# Allegro board SPARTAN6_TEST_V10A.brd
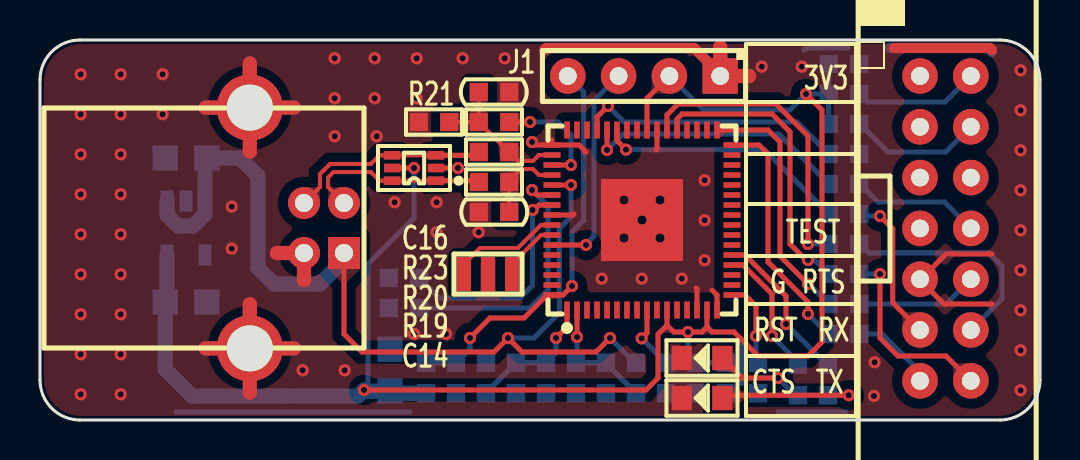
[diagram p0: board, top side]
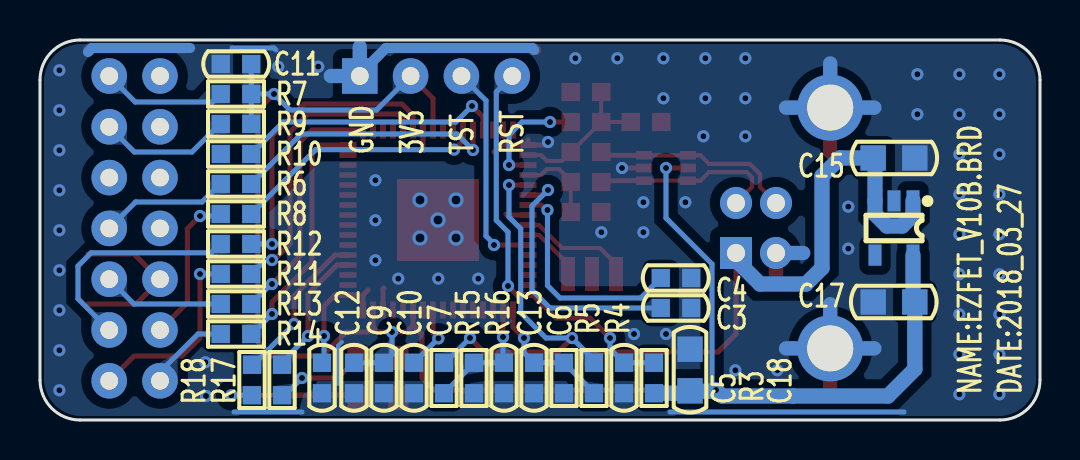
[diagram p1: board, bottom side, seen from below]

Outline 50 x 19 mm; copper layers: TOP, BOTTOM. Coordinates in mm from the lower left corner of the outline.
Outline path: 0,17 0,2 arc(0.59,0.59) 2,0 48,0 arc(49.41,0.59) 50,2 50,17 arc(49.41,18.41) 48,19 2,19 arc(0.59,18.41) 0,17

## Design rules (mm)
constraint set DEFAULT: min track width 0.203, pair gap 0.203
net group DIFFPAIR0: nets EZFET_DM EZFET_DP
net group DP2: nets EZFET_PU.0/DP EZFET_PU.1/DM

## Placement (name value [footprint] x y rotation side)
C3  220nF_50V  [CC0603]  18.2 5.6 0 bottom
C4  220nF_50V  [CC0603]  18.2 7.1 0 bottom
C5  1nF_50V  [CC0603]  20.8 2.1 90 bottom
C6  33pF_50V  [CC0603]  25.3 2.1 90 bottom
C7  0.1uF_50V  [CC0603]  31.3 2.1 90 bottom
C9  0.1uF_50V  [CC0603]  34.3 2.1 90 bottom
C10  0.1uF_50V  [CC0603]  32.8 2.1 90 bottom
C11  0.1uF_50V  [CC0603]  40.2 17.8 180 bottom
C12  470nF_50V  [CC0603]  35.9 2.1 90 bottom
C13  33pF_50V  [CC0603]  26.8 2.1 90 bottom
C14  10pF_50V  [CC0603]  22.7 10.4 0 top
C15  10uF_25V  [CC0805]  7.3 13.1 180 bottom
C16  10pF_50V  [CC0603]  22.7 16.4 180 top
C17  10uF_25V  [CC0805]  7.3 5.9 0 bottom
C18  10uF_25V  [CC0805]  17.5 2.5 90 bottom
D1  LED_RED  [LED0805]  33.1 3.1 180 top
D2  LED_GREEN  [LED0805]  33.1 1.1 180 top
J1  HEADER4X1_2R54/NI  [HEADER4X1_2R54]  30.2 17.2 180 top
JP2  -  [JTAG]  44 17.2 270 top
NOREF  -  []  0 0 90 top
NOREF#2  -  []  0 0 0 top
R3  47K  [RC0603]  19.3 2.1 90 bottom
R4  240K  [RC0603]  22.3 2.1 270 bottom
R5  150K  [RC0603]  23.8 2.1 270 bottom
R6  10R  [RC0603]  40.2 11.8 0 bottom
R7  0R  [RC0603]  40.2 16.3 0 bottom
R8  10R  [RC0603]  40.2 10.3 0 bottom
R9  0R/NI  [RC0603]  40.2 14.8 0 bottom
R10  10R  [RC0603]  40.2 13.3 0 bottom
R11  10R  [RC0603]  40.2 7.3 0 bottom
R12  10R  [RC0603]  40.2 8.8 0 bottom
R13  10R  [RC0603]  40.2 5.8 0 bottom
R14  10R  [RC0603]  40.2 4.3 0 bottom
R15  220K  [RC0603]  29.8 2.1 270 bottom
R16  220K  [RC0603]  28.3 2.1 270 bottom
R17  510R  [RC0603]  37.9 2 90 bottom
R18  510R  [RC0603]  39.4 2 90 bottom
R19  27R  [RC0603]  22.7 11.9 0 top
R20  27R  [RC0603]  22.7 13.4 0 top
R21  1M  [RC0603]  19.7 14.9 0 top
R23  1.4K  [RC0603]  22.7 14.9 0 top
U1  MSP430F5528IRGC  [VQFN-64]  30.1 10 0 top
U2  SPX3819M5-L-3-3/TR  [SOT23-5]  7.3 9.6 0 bottom
U3  NUP4202W1T2G  [SC-88]  18.7 12.6 180 top
USB1  -  [USB-B]  15.2 9.6 270 top
X1  CSTCR4M00G53  [X-3P-3R2X1R3-SMD]  21.2 7.3 0 top

## Library data of the parts
C3-C7 C9-C14 C16 = CAP NP
C15 C17 C18 = CAP NP_2
D1 D2 = LED_4
J1 = CONN RCPT 4
JP2 = JTAG
R3-R21 R23 = R_Generic
U1 = MSP430F5528IRGC
U2 = SPX3819M5-L-1-2
U3 = nup2202w1_D_2
USB1 = USB-B
X1 = XTAL_5032_0

## Footprints (pads in the part's own frame, mm; a bottom-side part is the same pattern mirrored in y, then rotated)
CC0603
  rect 0.914x0.914 smd: 1(-0.762,0) 2(0.762,0)
CC0805
  rect 1.27x1.27 smd: 1(-1.041,0) 2(1.041,0)
HEADER4X1_2R54
  rect 1.778x1.778 hole 0.889: 1(-3.81,0)
  round 1.778 hole 0.889: 2(-1.27,0) 3(1.27,0) 4(3.81,0)
JTAG
  round 1.778 hole 0.889: 1(0,0) 2(0,2.54) 3(2.54,0) 4(2.54,2.54) 5(5.08,0) 6(5.08,2.54) 7(7.62,0) 8(7.62,2.54) 9(10.16,0) 10(10.16,2.54) 11(12.7,0) 12(12.7,2.54) 13(15.24,0) 14(15.24,2.54)
LED0805
  rect 1.016x1.219 smd: 1(-1.016,0) 2(1.016,0)
RC0603
  rect 0.914x0.914 smd: 1(-0.762,0) 2(0.762,0)
SC-88
  rect 0.813x0.432 smd: 1(-1.092,0.635) 2(-1.092,0) 3(-1.092,-0.635) 4(1.092,-0.635) 5(1.092,0) 6(1.092,0.635)
SOT23-5
  rect 0.65x1.06 smd: 1(-0.95,-1.354) 2(0,-1.354) 3(0.95,-1.354) 4(0.95,1.354) 5(-0.95,1.354)
USB-B
  rect 1.6x1.6 hole 0.9: 1(1.25,0)
  round 1.6 hole 0.9: 2(-1.25,0) 3(-1.25,-2) 4(1.25,-2)
  round 3.3 hole 2.3: 5(6.02,-4.71) 6(-6.02,-4.71)
VQFN-64
  rect 0.28x0.85 smd: 1(-3.75,-4.5) 2(-3.25,-4.5) 3(-2.75,-4.5) 4(-2.25,-4.5) 5(-1.75,-4.5) 6(-1.25,-4.5) 7(-0.75,-4.5) 8(-0.25,-4.5) 9(0.25,-4.5) 10(0.75,-4.5) 11(1.25,-4.5) 12(1.75,-4.5) 13(2.25,-4.5) 14(2.75,-4.5) 15(3.25,-4.5) 16(3.75,-4.5) 33(3.75,4.5) 34(3.25,4.5) 35(2.75,4.5) 36(2.25,4.5) 37(1.75,4.5) 38(1.25,4.5) 39(0.75,4.5) 40(0.25,4.5) 41(-0.25,4.5) 42(-0.75,4.5) 43(-1.25,4.5) 44(-1.75,4.5) 45(-2.25,4.5) 46(-2.75,4.5) 47(-3.25,4.5) 48(-3.75,4.5)
  rect 0.85x0.28 smd: 17(4.5,-3.75) 18(4.5,-3.25) 19(4.5,-2.75) 20(4.5,-2.25) 21(4.5,-1.75) 22(4.5,-1.25) 23(4.5,-0.75) 24(4.5,-0.25) 25(4.5,0.25) 26(4.5,0.75) 27(4.5,1.25) 28(4.5,1.75) 29(4.5,2.25) 30(4.5,2.75) 31(4.5,3.25) 32(4.5,3.75) 49(-4.5,3.75) 50(-4.5,3.25) 51(-4.5,2.75) 52(-4.5,2.25) 53(-4.5,1.75) 54(-4.5,1.25) 55(-4.5,0.75) 56(-4.5,0.25) 57(-4.5,-0.25) 58(-4.5,-0.75) 59(-4.5,-1.25) 60(-4.5,-1.75) 61(-4.5,-2.25) 62(-4.5,-2.75) 63(-4.5,-3.25) 64(-4.5,-3.75)
  rect 4.1x4.1 smd: 65(0,0)
X-3P-3R2X1R3-SMD
  rect 0.7x1.7 smd: 1(0,0) 2(1.2,0) 3(2.4,0)

## Nets
GND: C3.1 C4.1 C5.1 C6.1 C7.1 C9.1 C10.1 C11.1 C12.1 C13.1 C14.1 C15.2 C16.1 C17.2 C18.2 D1.2(CATHODE) D2.2(CATHODE) J1.1 JP2.9 R5.2 R16.2 R21.1 U1.14 U1.16 U1.39 U1.49 U1.56 U1.65 U2.2 U3.2 USB1.4 USB1.5 USB1.6 X1.2
VCC_TARGET: JP2.4 R9.2
VCC_TOOL: JP2.2 R7.2
EZFET_AVBUS: C6.2 R4.2 R5.1 U1.1
EZFET_AVCC2ADC: C13.2 R15.2 R16.1 U1.2
EZFET_DM: R19.1 U3.1 U3.6 USB1.2
EZFET_DP: R20.1 U3.3 U3.4 USB1.3
EZFET_LED0: R17.2 U1.20
EZFET_LED1: R18.2 U1.21
EZFET_PU.0/DP: C16.2 R20.2 R21.2 R23.1 U1.50
EZFET_PU.1/DM: C14.2 R19.2 U1.52
EZFET_PUR: R23.2 U1.51
EZFET_RST: C5.2 J1.4 R3.2 U1.64
EZFET_TCK: U1.63
EZFET_TDI: U1.61
EZFET_TDO: U1.60
EZFET_TEST: J1.3 U1.59
EZFET_TMS: U1.62
EZFET_V18: C4.2 U1.55
EZFET_VBUS: C15.1 R4.1 R15.1 U1.53 U2.1 U2.3 USB1.1(VBUS)
EZFET_VCC: C9.2 C10.2 C11.2 C17.1 C18.1 J1.2 R3.1 R7.1 R9.1 U1.11 U1.15 U1.40 U2.5(VOUT) U3.5
EZFET_VCORE: C12.2 U1.17
EZFET_VREF: C7.2 U1.9
EZFET_VUSB: C3.2 U1.54(VUSB)
T_NC_TMSC: R10.2
T_RST_RST: JP2.11 R8.2
T_TEST_TCKC: JP2.8 R6.2
T_UART_CTS: JP2.13 R14.2
T_UART_RTS: JP2.10 R13.2
T_UART_RXD: JP2.12 R12.2
T_UART_TXD: JP2.14 R11.2
N16723149: U1.58 X1.3
N16723151: U1.57 X1.1
N16723191: D1.1 R17.1
N16723193: D2.1 R18.1
N16723211: R14.1 U1.32
N16723239: R11.1 U1.37
N16723243: R12.1 U1.38
N16723247: R13.1 U1.33
N16729620: R6.1 U1.44
N16729632: R8.1 U1.43
N16729644: R10.1 U1.45

Pads without a net: JP2 1 3 5 6 7; U1 3 4 5 6 7 8 10 12 13 18 19 22 23 24 25 26 27 28 29 30 31 34 35 36 41 42 46 47 48; U2 4

## Via types
v1: diameter 0.61, hole 0.305, TOP to BOTTOM, 92 vias
v2: diameter 0.762, hole 0.457, TOP to BOTTOM, 5 vias

## Routing (per net, layer and track width the routed paths; a pad name or vN(x,y) marks a point on that pad's centre or on a via; arc(x,y) is an arc through that point)
GND: length 105.8
  TOP w0.254: v1(24.6,13.9) 24.75,13.75 U1.49 ; U1.49 26.95,13.75 27.3,13.4 ; U1.49 25.6,14 ; 45.5,8.3 47.6,8.3 ; 30.8,13.5 30.85,13.55 U1.39 ; 26.7,10.3 26.65,10.25 U1.56 ; 47.6,5.8 45.2,5.8 44,7 JP2.9 44.04,7.04 45.3,8.3 ; 32.8,6.6 32.85,6.55 U1.14 ; 33.6,6.5 33.85,6.25 U1.16 ; U3.2 v1(20.9,12.6)
  TOP w0.508: 25.2,18.5 25.3,18.6 32.7,18.6 34.01,17.29 ; 42.7,18.6 47.5,18.6 47.6,18.5
  TOP w0.711: 35.46,17.2 J1.1 34.01,18.65 ; 10.49,13.41 USB1.6 ; USB1.6 10.49,17.83 ; USB1.6 12.7,15.62 ; USB1.6 8.28,15.62 ; USB1.5 10.49,5.79 ; USB1.5 12.7,3.58 ; USB1.5 8.28,3.58 ; USB1.5 10.49,1.37 ; 11.84,8.35 USB1.4 13.2,6.99
  BOTTOM w0.203: 35.1,1.8 35.1,3.7 34.9,3.9
  BOTTOM w0.254: 40.4,18.6 38.3,18.6 38.2,18.5 ; 6.8,0.4 18.5,0.4 ; 36.9,0.4 40.3,0.4
  BOTTOM w0.508: 47.6,18.4 47.4,18.6 42.5,18.6 ; 34.01,17.29 32.7,18.6 25.4,18.6 25.3,18.5
  BOTTOM w0.711: USB1.5 12.7,3.58 ; USB1.5 10.49,5.79 ; USB1.5 8.28,3.58 ; 34.01,18.65 J1.1 35.46,17.2 ; USB1.6 10.49,17.83 ; USB1.6 12.7,15.62 ; USB1.6 8.28,15.62 ; 11.84,8.35 USB1.4
  vias: v1(2.03,17.29) v1(2.03,15.29) v1(2.03,13.29) v1(2.03,11.29) v1(2.03,9.29) v1(2.03,7.29) v1(2.03,5.29) v1(2.03,3.29) v1(2.03,1.29) v1(4.03,17.29) v1(4.03,15.29) v1(4.03,13.29) v1(4.03,11.29) v1(4.03,9.29) v1(4.03,7.29) v1(4.03,5.29) v1(4.03,3.29) v1(4.03,1.29) v1(6.13,17.29) v1(6.13,15.29) v1(9.59,10.67) v1(9.59,8.57) v1(13.13,2.49) v1(14.73,18.09) v1(14.73,16.09) v1(14.73,14.19) v1(15.23,2.49) v1(16.73,18.09) v1(16.73,16.09) v1(16.83,14.19) v1(17.73,10.89) v1(18.7,4.3) v1(18.83,18.09) v1(18.83,16.09) v1(19.83,10.89) v1(19.83,9.39) v1(20.3,4.3) v1(21.13,18.09) v1(21.93,9.39) v1(23.23,18.09) v1(28.09,7.07) v1(30.09,7.07) v1(32.09,7.07) v1(33.23,11.99) v1(33.23,9.99) v1(33.23,7.99) v1(36.09,17.67) v1(38.09,17.67) v1(41.73,2.89) v1(41.7,1.2) v1(49.03,17.49) v1(49.03,15.49) v1(49.03,13.49) v1(49.03,11.49) v1(49.03,9.49) v1(49.03,7.49) v1(49.03,5.49) v1(49.03,3.49) v1(49.03,1.49) v2(29.2,11) v2(29.2,9.1) v2(30.1,10) v2(31,11) v2(31,9.1)
VCC_TARGET: length 6.7
  BOTTOM w0.254: JP2.4 45.28,13.4 42.4,13.4 41,14.8 R9.2
VCC_TOOL: length 6.3
  BOTTOM w0.254: R7.2 41.36,15.9 45.24,15.9 JP2.2
EZFET_AVBUS: length 6.7
  TOP w0.254: v1(25.8,4.1) 26.35,4.65 U1.1
  BOTTOM w0.254: R4.2 22.3,1.36 R5.1 C6.2 25.8,3.36 v1(25.8,4.1)
EZFET_AVCC2ADC: length 6.3
  TOP w0.254: U1.2 v1(26.85,4.15)
  BOTTOM w0.254: v1(26.85,4.15) 26.85,2.91 C13.2 R16.1 28.3,2.84 R15.2
EZFET_DM: length 9.5
  TOP w0.203: USB1.2 14.4,11.65 14.4,12.13 14.67,12.4 16.54,12.4 16.97,11.96 U3.6 U3.1
  TOP w0.254: U3.1 21.87,11.96 R19.1
EZFET_DP: length 10.2
  TOP w0.203: U3.3 U3.4 16.97,13.23 16.54,12.8 14.5,12.8 14,12.3 14,11.65 USB1.3
  TOP w0.254: U3.3 21.77,13.23 R20.1
EZFET_LED0: length 6.7
  TOP w0.254: U1.20 35.15,7.75 36.6,6.3 v1(36.6,4.2)
  BOTTOM w0.254: R17.2 37.9,2.9 v1(36.6,4.2)
EZFET_LED1: length 7.9
  TOP w0.254: v1(37.3,4.8) 37.3,6.2 35.25,8.25 U1.21
  BOTTOM w0.254: R18.2 39.34,2.76 v1(37.3,4.8)
EZFET_PU.0/DP: length 7.6
  TOP w0.203: C16.2 R23.1 ; R23.1 R21.2 ; R23.1 23.44,13.4 R20.2 23.91,12.95 24.65,12.95 24.95,13.25 U1.50
EZFET_PU.1/DM: length 4.1
  TOP w0.203: U1.52 24.95,12.25 24.65,12.55 24.05,12.55 23.46,11.96 R19.2 C14.2
EZFET_PUR: length 5.8
  TOP w0.254: U1.51 v1(26.55,12.75) ; R23.2 v1(24.5,14.9)
  BOTTOM w0.254: v1(26.55,12.75) 26.55,14.25 25.9,14.9 v1(24.5,14.9)
EZFET_RST: length 20.3
  TOP w0.254: v1(21.5,4.1) 22.5,5.1 24.2,5.1 25.35,6.25 U1.64 26.15,6.25 v1(26.6,6.7)
  BOTTOM w0.254: v1(21.5,4.1) 21.5,3.56 C5.2 R3.2 ; J1.4 27.18,16.41 27.18,9.98 26.6,9.4 v1(26.6,6.7)
EZFET_TEST: length 10.8
  TOP w0.254: U1.59 v1(27.3,8.75)
  BOTTOM w0.254: v1(27.3,8.75) 27.3,8.8 27.7,9.2 27.7,15.97 J1.3
EZFET_V18: length 11.2
  TOP w0.254: U1.55 24.95,10.75 24.7,10.5 v1(24.63,10.5)
  BOTTOM w0.254: C4.2 19.96,6.1 24,6.1 24.63,6.73 v1(24.63,10.5)
EZFET_VBUS: length 51.7
  TOP w0.254: USB1.1 15.2,4.3 16.1,3.4 22.7,3.4 v1(23.4,4.1) 24.1,3.4 27.8,3.4 v1(28.5,4.1) ; U1.53 v1(26.55,11.75)
  BOTTOM w0.254: R4.1 22.3,3 v1(23.4,4.1) 24.7,4.1 25.96,5.37 25.96,9.56 26.55,10.15 v1(26.55,11.75) ; v1(28.5,4.1) 29.74,2.86 R15.1
  BOTTOM w0.762: U2.1 6.35,10.24 6.89,9.7 7.66,9.7 8.25,10.29 U2.3 8.25,13.01 C15.1 10,13.1 10.9,12.2 10.9,7.6 11.7,6.8 14,6.8 15.2,8 USB1.1
EZFET_VCC: length 92.1
  TOP w0.254: J1.2 30.35,16.08 U1.40 ; 31.35,4.73 30.9,4.28 30.9,2.1 30.3,1.5 v1(16.2,1.5) ; 31.35,4.73 31.68,4.4 v1(32.4,4.4) 33.1,4.4 33.35,4.65 ; 31.35,4.73 U1.11 ; U3.5 v1(18.7,12.6) ; 33.35,4.65 33.6,4.4 34.7,4.4 35.9,3.2 38.4,3.2 39.1,3.9 39.1,15.5 v1(38.3,16.3) ; 33.35,4.65 U1.15
  BOTTOM w0.254: R7.1 C11.2 ; R7.1 v1(38.3,16.3) 37.5,15.5 33.17,15.5 J1.2 ; R7.1 R9.1 ; C9.2 C10.2 32.4,3.26 v1(32.4,4.4) ; v1(16.2,1.5) 16.4,1.7 16.4,7.8 18.7,10.1 v1(18.7,12.6)
  BOTTOM w0.762: R3.1 17.62,1.34 C18.1 17.36,1.46 17.34,1.44 16.26,1.44 v1(16.2,1.5) 15.9,1.2 12.35,1.2 12.34,1.2 7.6,1.2 6.26,2.54 C17.1 6.35,5.99 U2.5
EZFET_VCORE: length 4.3
  TOP w0.254: v1(35.8,4.2) 35.8,5.7 35.25,6.25 U1.17
  BOTTOM w0.254: C12.2 35.8,2.96 v1(35.8,4.2)
EZFET_VREF: length 3.3
  TOP w0.254: v1(30.08,4.08) 30.35,4.35 U1.9
  BOTTOM w0.254: v1(30.08,4.08) C7.2
EZFET_VUSB: length 13.2
  TOP w0.254: U1.54 24.85,11.25 v1(24.6,11.5)
  BOTTOM w0.254: C3.2 24.5,5.6 25.4,6.5 25.4,10.7 v1(24.6,11.5)
T_RST_RST: length 7.6
  TOP w0.254: v1(42,10.2) 42.63,9.56 42.63,5.87 JP2.11
  BOTTOM w0.254: v1(42,10.2) 41.06,10.2 R8.2
T_TEST_TCKC: length 6.5
  BOTTOM w0.254: R6.2 41,11.8 41.9,10.9 45.22,10.9 JP2.8
T_UART_CTS: length 4.3
  BOTTOM w0.254: R14.2 42.1,4.3 44,2.4 JP2.13
T_UART_RTS: length 6.1
  BOTTOM w0.254: JP2.10 45.3,5.8 R13.2
T_UART_RXD: length 11.4
  BOTTOM w0.254: JP2.12 48.1,6.06 48.1,7.7 47.44,8.36 41.44,8.36 41,8.8 R12.2
T_UART_TXD: length 9.7
  TOP w0.254: v1(42,7.3) 42,4.1 42.9,3.2 45.3,3.2 JP2.14
  BOTTOM w0.254: R11.2 v1(42,7.3)
N16723149: length 3.1
  TOP w0.203: X1.3 23.6,7.8 25.05,9.25 U1.58
N16723151: length 5.7
  TOP w0.203: X1.1 21.2,7.8 22,8.6 23.9,8.6 25.05,9.75 U1.57
N16723191: length 4.6
  TOP w0.254: v1(36.9,2.1) 35.12,2.1 D1.1
  BOTTOM w0.254: v1(36.9,2.1) 37.76,1.24 R17.1
N16723193: length 7.4
  TOP w0.254: D2.1 34.25,1.24 v1(40.44,1.24)
  BOTTOM w0.254: R18.1 v1(40.44,1.24)
N16723211: length 12.3
  TOP w0.254: U1.32 35.95,13.75 36.4,13.3 36.4,7.9 38.4,5.9 v1(38.4,5.3)
  BOTTOM w0.254: v1(38.4,5.3) 39.4,4.3 R14.1
N16723239: length 14.8
  TOP w0.254: U1.37 31.85,15.05 32.1,15.3 36.6,15.3 37.5,14.4 37.5,8.8 38.3,8 v1(38.4,8)
  BOTTOM w0.254: R11.1 38.74,8 v1(38.4,8)
N16723243: length 15.1
  TOP w0.254: v1(38.4,8.8) 38.4,14.2 36.8,15.8 31.9,15.8 31.35,15.25 U1.38
  BOTTOM w0.254: R12.1 v1(38.4,8.8)
N16723247: length 12.5
  TOP w0.254: v1(38.4,6.8) 37,8.2 37,13.9 36.4,14.5 U1.33
  BOTTOM w0.254: R13.1 38.44,6.8 v1(38.4,6.8)
N16729620: length 13.5
  TOP w0.254: U1.44 v1(28.35,13.5)
  BOTTOM w0.254: R6.1 36.94,14.3 29.15,14.3 v1(28.35,13.5)
N16729632: length 12.6
  TOP w0.254: U1.43 28.85,13.97 v1(29.3,13.52)
  BOTTOM w0.254: v1(29.3,13.52) 36.22,13.52 R8.1
N16729644: length 13.5
  TOP w0.254: U1.45 27.85,15.15 v1(28.4,15.7)
  BOTTOM w0.254: R10.1 37.84,14.9 29.2,14.9 v1(28.4,15.7)

## Copper pours and planes (outline as drawn; the poured copper is in the pictures)
GND on TOP: 0.2,17 0.75,18.25 2,18.8 48,18.8 49.25,18.25 49.8,17 49.8,2 49.25,0.75 48,0.2 2,0.2 0.75,0.75 0.2,2 ; 11 cut-outs
GND on BOTTOM: 0.2,17 0.75,18.25 2,18.8 48,18.8 49.25,18.25 49.8,17 49.8,2 49.25,0.75 48,0.2 2,0.2 0.75,0.75 0.2,2 ; 8 cut-outs

Small or netless copper shapes (teardrops, artwork), in the pictures only: 68 on TOP, 73 on BOTTOM

## Text on the board
Ref Des/Silkscreen Bottom: DATE:2018_03_27 | NAME:EZFET_V10B.BRD | RST | TST | 3V3 | GND
Ref Des/Silkscreen Top: CTS | RST | G | TEST | RTS | 3V3 | TX | RX
DISPLAY_TOP: FIGURE | FINISHED_SIZE | 0.3048 | 0.4572 | 0.889 | 0.9 | 2.3 | DRILL CHART: TOP to BOTTOM | ALL UNITS ARE IN MILLIMETERS | PLATED | QTY | 92 | 5 | 18 | 4 | 2
